# Altium PCB ESP32-PoE_Rev_G1.PcbDoc (part 2 of 3)
Units mm, origin at the board's own origin, x right, y up, seen from the top; angles counter-clockwise.
Board outline 28 x 75 mm, 2 copper layers (F.Cu, B.Cu); 132 components, 123 nets, 484 pads, 212 vias.
Unrouted connection lines stored in the file: 2.
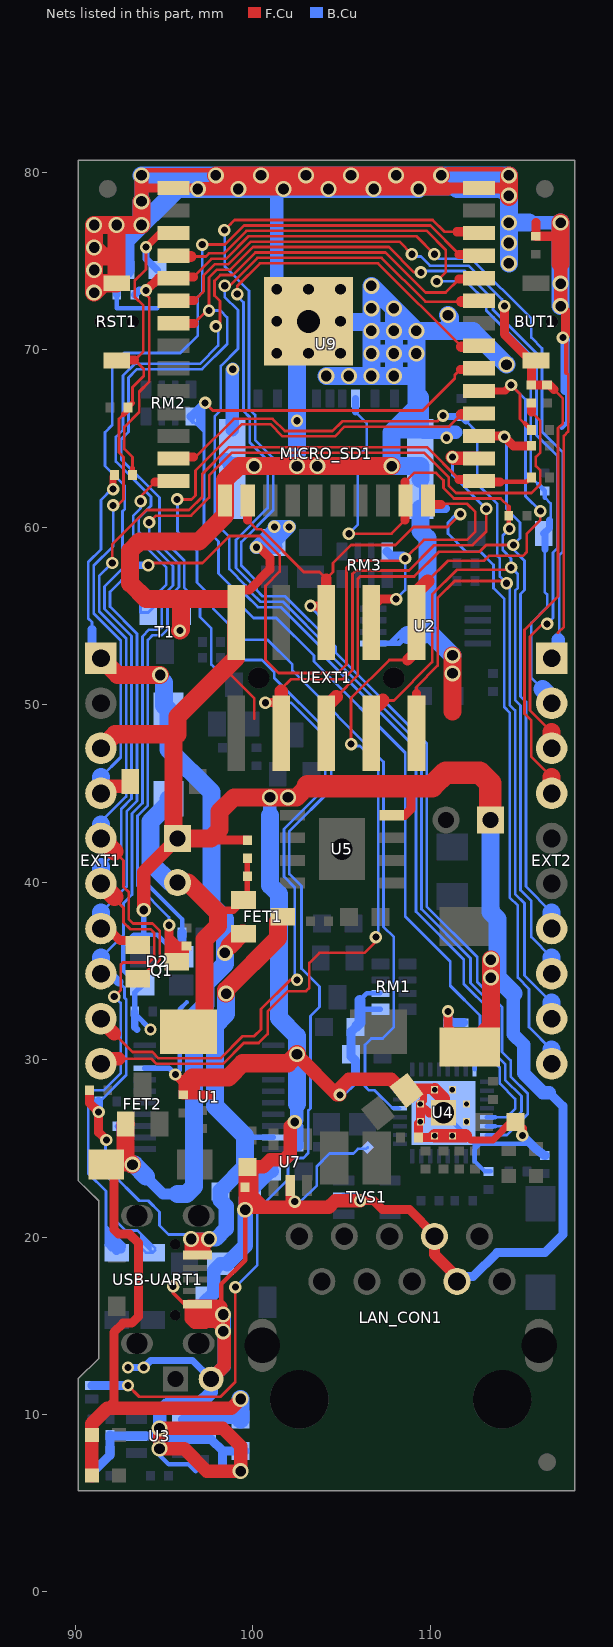
[diagram p2: the nets of this part, all layers, seen from the top]

## Via types
v1: diameter 0.7, hole 0.4, F.Cu to B.Cu, tented both sides, 119 vias
v2: diameter 0.9, hole 0.6, F.Cu to B.Cu, tented both sides, 89 vias
v3: diameter 0.8, hole 0.5, F.Cu to B.Cu, tented both sides, 4 vias

## Nets (pads, with @x,y where several pads share a name; then routed paths per layer and width w, separated by ;. In a path a pad name is that pad's centre, name@x,y a point inside that pad or via, vN(x,y) a via of type N, cw(c..) or ccw(c..) an arc to the next point about the centre after c; other vN are vias at no path point) (continued)
+5V: C1.1 CHRG1.2 D1.1 D3.2 EXT1.1 FET1.2 FET2.1 PWR1.2 R1.1 R4.1 U3.4 | length 88.8
  F.Cu w0.406: v1(92.126,62.156) 92.126,62.867 R4.1@92.202,62.943
  F.Cu w0.508: D3.2@91.757,24.145 92.17,23.732 92.17,20.43 92.433,20.167 93.049,20.167 93.548,19.668 93.548,15.521 93.175,15.148 92.685,15.148 92.164,14.626 92.164,10.721 91.783,10.34
  F.Cu w0.762: PWR1.2@90.932,6.555 90.932,7.254 CHRG1.2@90.932,8.841 90.932,9.489 91.783,10.34 98.781,10.34 98.864,10.423 v2(99.314,10.873) ; D3.2@91.734,24.081 v2(93.218,24.081) ; v2(98.425,36.019) 98.425,36.146 98.679,36.4
  F.Cu w1.016: EXT1.1@91.44,52.626 92.388,51.678 v2(94.775,51.678) ; FET2.1@92.84,26.367 92.837,26.364 92.837,24.437 v2@93.193,24.081 ; 98.679,36.4 99.377,37.099 FET1.2@99.477,37.099
  B.Cu w0.152: 90.932,54.244 90.932,54.663 90.726,54.868 90.726,58.038 91.44,58.752 91.44,61.546 92.05,62.156 v1(92.126,62.156)
  B.Cu w0.254: C1.1@99.068,9.976 C1.1@99.314,9.73 ; v2@99.203,10.476 99.314,10.365
  B.Cu w0.508: 90.932,54.244 90.932,53.134 EXT1.1@91.44,52.626 ; U3.4@96.042,9.728 97.788,9.728 R1.1@97.79,9.73 ; R1.1@97.663,9.603 R1.1@97.79,9.73 ; C1.1@99.314,9.73 R1.1@97.79,9.73
  B.Cu w0.635: 93.98,23.421 93.98,23.395 94.945,22.43 95.758,22.43
  B.Cu w0.762: v2(94.775,51.678) 94.775,51.48 94.996,51.259
  B.Cu w1.016: v2(93.218,24.081) 93.32,24.081 93.98,23.421 ; 94.996,51.259 94.996,49.949 D1.1@95.25,49.695 95.25,47.49 97.663,45.077 97.663,38.686 98.425,37.924 v2(98.425,36.019) 98.425,35.384 97.33,34.289 97.33,33.07 96.685,32.425 96.685,22.849 96.266,22.43 95.758,22.43 ; C1.1@99.314,9.73 99.314,10.365 v2(99.314,10.873)
+5V_USB: C7.1 FET1.3 R18.1 U1.19 USB-UART1.1 | length 38.2
  F.Cu w0.254: USB-UART1.1@96.626,18.904 USB-UART1.1@96.804,18.904
  F.Cu w0.508: 96.52,19.348 USB-UART1.1@96.876,18.992 97.536,19.651 v2(97.536,19.89)
  F.Cu w0.762: 96.52,19.348 v2(96.52,19.89) ; USB-UART1.1@97.282,19.128 v2(96.52,19.89) ; v2(97.536,19.89) v2(96.52,19.89) ; FET1.3@101.43,37.797 FET1.3@101.686,38.054
  F.Cu w1.016: v2(98.501,33.723) 98.501,33.936 101.43,36.865 FET1.3@101.43,37.797
  B.Cu w0.152: 92.456,25.732 92.456,24.97 92.075,24.589 92.075,23.573 93.599,22.049 94.107,22.049 94.742,21.414 94.742,20.652 95.25,20.144 96.266,20.144 v2(96.52,19.89)
  B.Cu w0.254: R18.1@92.329,26.24 92.456,26.113 92.456,25.732
  B.Cu w0.305: 99.568,25.691 99.643,25.616 U1.19@101.155,25.616
  B.Cu w0.762: v2(96.52,19.89) v2(97.536,19.89)
  B.Cu w0.864: v2(97.536,19.89) 97.917,19.89 98.501,20.474 98.501,21.744 98.171,22.074 C7.1@98.171,22.557 98.171,22.628 99.568,24.025
  B.Cu w1.016: v2(98.501,33.723) 98.501,32.565 97.866,31.93 97.866,27.393 99.568,25.691 99.568,24.025
+5VP: C23.1 C25.1 D1.2 FET1.1 L4.2 R38.1 | length 20.6
  F.Cu w0.305: FET1.1@99.477,39.001 99.695,39.219 R38.1@99.695,40.337 C23.1@99.695,41.353
  F.Cu w0.406: 98.044,38.284 98.183,38.423 98.898,38.423 FET1.1@99.477,39.001
  F.Cu w1.016: C25.1@95.758,39.976 96.352,39.976 98.044,38.284 98.044,37.543 97.282,36.781 97.282,32.479 L4.2@96.377,31.574
  B.Cu w1.016: D1.2@95.25,44.695 95.25,44.426 94.234,43.41 94.234,41.099 95.357,39.976 C25.1@95.758,39.976
D_Com: D2.3 R24.2 R49.2 | length 62.5
  F.Cu w0.152: v1(94.158,60.276) 94.539,60.657 96.52,60.657 97.536,61.673 97.536,62.918 98.83,64.211 109.653,64.211 111.049,62.816 111.049,62.341 111.457,61.932 115.702,61.932 116.205,62.435 116.205,63.197 115.951,63.451 115.951,63.959 116.205,64.213 116.205,65.991 115.697,66.499
  F.Cu w0.508: D2.3@95.279,35.667 95.279,36.879 ; v1(95.279,37.575) 95.279,36.879 ; D2.3@95.715,35.511 95.715,36.357 95.758,36.4 ; D2.3@95.758,35.511 96.135,35.511 96.139,35.515 96.139,36.273 R24.2@96.266,36.4 95.758,36.4 ; 115.697,66.499 R49.2@115.697,67.007 ; 95.279,36.879 95.279,36.429 95.308,36.4 95.758,36.4 ; 95.279,36.879 95.758,36.4
  B.Cu w0.152: v1(94.158,60.276) 94.158,59.598 95.834,57.921 95.834,56.632 95.186,55.985 95.186,54.244 94.869,53.926 94.361,53.926 94.082,53.647 94.082,44.325 93.497,43.741 93.497,39.804 95.279,38.022 v1(95.279,37.575)
ESP_EN: C20.1 D9.2 EXT1.4 R32.2 RST1.1 U9.3 | length 40.8
  F.Cu w0.152: v1(92.126,61.241) 92.38,61.241 92.71,61.571 92.71,63.959 92.456,64.213 92.456,66.118 92.71,66.372 ; 93.218,67.007 93.218,67.896 93.853,68.531 93.853,68.912 93.345,69.42 93.83,69.905 93.83,72.491 93.345,72.976 93.345,73.907 93.98,74.542 v1(93.98,75.791)
  F.Cu w0.305: 92.71,66.372 92.964,66.626 R32.2@92.964,66.753 93.218,67.007
  F.Cu w0.406: v1(93.98,75.791) 94.77,76.581 U9.3@95.64,76.581
  F.Cu w0.508: RST1.1@92.321,69.402 92.339,69.42 93.345,69.42
  F.Cu w0.762: EXT1.4@91.44,45.006 91.851,45.417 92.842,45.417 D9.2@93.096,45.671
  B.Cu w0.152: 91.44,45.925 92.558,47.043 92.558,53.621 91.034,55.145 91.034,57.838 92.126,58.93 v1(92.126,61.241)
  B.Cu w0.406: v1(93.98,75.791) 93.98,75.135 C20.1@94.615,74.5
  B.Cu w1.016: EXT1.4@91.44,45.006 91.44,45.925
GND: BAT1.2 C1.2 C2.1 C3.2 C4.2 C5.2 C6.2 C7.2 C8.2 C9.2 C11.2 C13.2 C14.2 C15.2 C16.2 C17.2 C18.2 C19.2 C20.2 C21.1 C22.2 C25.2 C27.2 D5.2 EXT1.3 L3.2 LAN_CON1.7 LAN_CON1.8 MICRO_SD1.6 MICRO_SD1.CH1 Q1.3 R1.2 R5.2 R6.2 R9.2 R15.2 R22.2 R26.2 R30.2 R34.2 R41.1 R47.2 RM1.1.1 RM1.2.1 RST1.2 T1.2 TVS1.2 U1.8 U2.5 U3.2 U4.24 U4.25 U4.33 U5.4 U7.2 U9.1 U9.15 U9.38 U9.39 UEXT1.2 USB-UART1.5 | length 621.9
  F.Cu w0.152: 98.369,51.95 98.496,51.95 100.076,50.37 100.076,49.227 ; 117.203,54.063 117.528,54.388 117.528,65.153 117.775,65.399 117.775,68.612 117.665,68.722
  F.Cu w0.203: v1@95.507,17.525 95.507,16.862 96.152,16.217 USB-UART1.5@96.876,16.217
  F.Cu w0.254: v2(93.726,79.834) 94.025,80.133 97.618,80.133 v2(97.917,79.834) ; 98.209,16.217 98.209,17.337 99.568,18.696 v2(99.568,21.541) ; 104.521,21.922 104.648,22.049 ; v2(110.617,79.834) 110.954,80.171 114.09,80.171 v2(114.427,79.834) ; v1(117.475,70.69) 117.665,70.5 117.665,68.722
  F.Cu w0.406: 99.949,22.43 100.076,22.43 100.838,21.668 ; C22.2@109.626,28.04 109.626,27.684 U4.33@109.444,27.502 109.944,27.002 ; 111.984,25.702 112.044,25.702 112.268,25.478 113.538,25.478 114.554,26.494 C21.1@114.808,26.494 ; C21.1@115.062,26.494 C21.1@114.808,26.494 ; C21.1@115.189,26.113 C21.1@114.808,26.494
  F.Cu w0.508: v2(93.726,79.834) 93.726,79.326 93.931,79.121 U9.1@95.54,79.121 96.852,79.121 v2(96.901,79.072) ; v1(95.631,29.161) 96.012,28.78 96.393,28.78 96.08,28.78 96.075,28.776 C8.2@96.075,28.018 ; 96.774,28.399 96.393,28.018 C8.2@96.075,28.018 ; USB-UART1.5@97.346,16.207 97.346,15.064 ; 97.643,42.476 97.75,42.369 R34.2@99.695,42.369 ; 97.663,28.018 C8.2@96.075,28.018 ; v2(98.331,14.683) 97.881,15.133 97.414,15.133 97.346,15.064 ; v2(98.331,15.636) 98.331,16.095 98.209,16.217 USB-UART1.5@96.876,16.217 96.402,16.217 96.393,16.207 96.393,15.382 96.71,15.064 97.346,15.064 ; UEXT1.2@98.933,55.958 99.06,55.831 UEXT1.2@99.06,54.638 99.06,56.339 99.187,56.466 99.794,56.466 100.965,57.637 100.965,58.273 100.359,58.879 v1(100.203,58.879) ; R30.2@99.568,22.684 R30.2@99.568,22.811 99.568,23.827 C6.2@99.695,23.954 ; C6.2@99.568,23.954 C6.2@99.695,23.954 ; 99.695,23.192 C6.2@99.695,23.954 ; v2(100.076,63.451) 100.571,63.451 ; U7.2@102.108,22.908 102.108,21.922 102.362,21.668 v1(102.362,21.998) ; v1(106.045,22.049) 106.807,22.049 107.315,21.541 108.839,21.541 110.236,20.144 LAN_CON1.7@110.236,20.04 LAN_CON1.7@110.236,19.763 ; U5.4@107.829,43.766 108.554,43.766 108.917,44.129 108.917,45.339 108.839,45.417 ; C22.2@108.662,28.253 C22.2@108.767,28.358 ; U4.33@109.444,27.502 U4.33@109.444,26.502 109.347,26.405 C11.2@109.347,25.605 110.147,25.605 U4.33@110.244,25.702 ; 109.944,27.002 U4.33@110.744,27.002 ; U4.33@110.188,28.358 U4.33@110.244,28.302 U4.33@110.206,28.302 ; v1(110.998,32.717) 110.998,31.828 112.112,30.714 D5.2@112.217,30.714 ; v1(115.189,25.732) C21.1@115.189,26.113 ; R47.2@115.951,76.405 115.951,77.167 ; R47.2@116.078,76.405 116.967,76.405 117.348,76.024 v2(117.348,72.468) 117.615,72.201 117.615,70.83 v1(117.475,70.69)
  F.Cu w0.61: C22.2@108.767,28.358 U4.33@110.188,28.358 ; LAN_CON1.7@110.236,20.04 110.236,19.017 111.506,17.747 LAN_CON1.8@111.506,17.5 ; 110.944,79.072 110.993,79.121 U9.38@112.74,79.121 113.997,79.121 v2(114.427,78.691)
  F.Cu w0.762: v2(93.726,78.374) v2(93.726,79.834) ; v3(93.853,38.432) 93.853,40.571 C25.2@95.758,42.476 ; 96.774,15.636 v2(98.331,15.636) v2(98.331,14.683) 98.4,14.614 98.4,12.753 BAT1.2@97.663,12.016 ; v2(96.901,79.072) 110.944,79.072 ; C6.2@99.568,23.954 R30.2@99.568,22.811 v2(99.568,21.541) ; v3(102.362,26.494) 102.108,26.24 102.108,24.716 101.753,24.361 100.991,24.361 100.584,23.954 C6.2@99.695,23.954 99.949,23.7 99.949,22.43 99.949,21.922 v2(99.568,21.541) ; v2(102.489,30.304) 102.489,30.257 104.728,28.018 v1(104.902,28.018) 104.902,28.374 105.41,28.882 107.798,28.882 108.426,28.253 C22.2@108.662,28.253 ; v1(106.045,22.049) 104.648,22.049 104.267,21.668 103.251,21.668 102.362,21.668 101.092,21.668 100.838,21.668 99.695,21.668 v2(99.568,21.541) ; U4.33@110.244,25.702 110.714,25.702 U4.33@111.244,25.702 111.984,25.702 ; U4.33@110.244,28.302 110.744,27.802 U4.33@110.744,27.002 ; v2(117.348,72.468) v2(117.348,73.738) 117.348,74.881 ; v2(94.742,8.079) v2(94.742,9.222) 98.298,9.222 99.314,8.206 v2(99.314,6.809) 97.409,6.809 96.139,8.079 v2(94.742,8.079)
  F.Cu w1.016: v2(91.059,75.77) 91.567,75.262 92.329,75.262 ; EXT1.3@91.44,47.546 92.232,48.338 95.758,48.338 ; RST1.2@92.321,73.756 91.585,73.756 v2(91.059,73.23) v2(91.059,77.04) v2(93.726,77.04) v2(93.726,78.374) ; RST1.2@92.329,73.992 92.329,75.262 ; v2(92.329,77.04) 92.329,75.262 ; v1(95.885,54.18) 95.955,54.25 95.955,55.774 96.139,55.958 ; 96.393,28.78 96.52,28.907 96.606,28.993 98.618,28.993 99.421,29.796 101.981,29.796 v2(102.489,30.304) ; v2(97.917,79.834) v2(110.617,79.834) ; UEXT1.2@98.933,55.958 96.139,55.958 ; UEXT1.2@99.06,54.638 99.06,52.641 98.369,51.95 95.758,49.339 95.758,48.338 ; 103.095,45.417 102.46,44.782 v2(101.981,44.782) v2(100.965,44.782) 98.928,44.782 98.126,43.98 98.126,42.959 97.643,42.476 C25.2@95.758,42.476 95.518,42.716 95.518,48.098 95.758,48.338 ; v2(107.823,63.451) v2(103.632,63.451) v2(102.489,63.451) v2(100.076,63.451) 99.211,63.451 98.44,62.68 U9.15@98.44,61.511 98.44,60.672 96.977,59.209 93.623,59.209 93.091,58.678 93.091,56.847 93.98,55.958 96.139,55.958 ; 111.252,49.608 v2(111.252,52.783) ; D5.2@111.916,30.812 112.141,30.587 113.411,31.857 v2(113.411,34.622) v2(113.411,35.638) ; v2@114.427,78.628 114.427,79.198 v2(114.427,79.834) ; 117.348,74.881 v2(117.348,77.167)
  F.Cu w1.27: 103.095,45.417 108.839,45.417 110.109,45.417 110.871,46.179 112.776,46.179 113.391,45.564 C27.2@113.391,43.512
  B.Cu w0.152: MICRO_SD1.CH1@98.84,61.059 MICRO_SD1.CH1@98.84,63.459 ; v1(102.362,21.998) 102.692,21.998 103.607,22.913 103.607,23.992 104.331,24.716 105.664,24.716 105.918,24.97 106.386,24.97 R26.2@106.47,25.053 ; MICRO_SD1.CH1@109.44,61.059 MICRO_SD1.CH1@109.44,63.459
  B.Cu w0.203: C13.2@101.092,23.7 101.092,23.73 102.296,24.934 102.453,24.934 C16.2@102.616,25.097
  B.Cu w0.254: R9.2@92.329,73.103 92.329,72.341 94.615,72.341 ; Q1.3@93.769,34.203 93.51,34.203 92.71,35.003 92.71,36.451 93.294,37.035 93.853,37.035 94.615,37.035 95.847,35.803 Q1.3@95.969,35.803 Q1.3@96.096,35.93 ; 93.98,39.956 96.012,37.924 C4.2@96.012,37.162 ; v2(94.742,8.079) 94.742,7.698 95.25,7.19 96.393,7.19 96.774,6.809 ; v1(95.631,29.161) 95.885,29.415 95.885,32.844 96.266,33.225 ; 106.045,33.352 106.426,33.733 RM1.2.1@107.188,33.733 ; U4.33@110.744,27.002 U4.33@112.494,25.252 ; C15.2@113.411,23.7 113.081,23.7 112.494,24.287 U4.25@112.494,24.552 ; 115.951,24.97 115.669,25.252 114.335,25.252 U4.24@113.194,25.252 ; 117.411,65.61 117.729,65.928 117.729,67.579 117.602,67.706 ; U4.25@112.494,24.552 U4.33@112.494,25.252 ; U4.25@112.494,24.552 112.494,24.942 112.804,25.252 U4.24@113.194,25.252 ; U4.33@112.494,25.252 U4.24@113.194,25.252
  B.Cu w0.305: Q1.3@93.769,34.203 93.345,33.779 C5.2@93.345,32.717 93.345,32.59 v1(94.234,31.701) ; 93.853,37.035 v3(93.853,38.432) ; U1.8@93.916,29.516 95.276,29.516 v1(95.631,29.161) ; Q1.3@95.758,36.083 Q1.3@96.075,35.765 ; 106.045,32.844 RM1.1.1@107.188,32.844 ; U2.5@106.778,53.459 107.737,53.459 ; 108.331,54.053 107.737,53.459 ; 108.712,53.926 108.245,53.459 107.737,53.459
  B.Cu w0.406: R9.2@92.329,73.103 92.329,73.992 C20.2@92.837,74.5 ; v1(92.964,12.651) v1(93.853,12.651) 94.251,13.049 96.597,13.049 BAT1.2@97.65,11.996 ; C5.2@93.345,32.717 93.345,31.828 93.472,31.701
  B.Cu w0.508: R5.2@90.932,6.555 90.932,6.682 91.948,7.698 C19.2@91.948,7.952 R22.2@91.948,8.841 92.011,8.778 U3.2@93.442,8.778 94.297,8.778 v2(94.742,9.222) 95.377,8.587 R1.2@97.663,8.587 98.298,7.952 ; Q1.3@96.012,35.765 C4.2@96.012,37.162 ; BAT1.2@97.643,11.996 BAT1.2@97.65,11.996 BAT1.2@97.757,11.889 ; v2(98.331,15.636) v2@98.35,15.616 ; MICRO_SD1.CH1@98.84,62.951 99.34,63.451 99.581,63.451 v2(100.076,63.451) ; C1.2@99.06,8.206 C1.2@99.314,7.952 ; C1.2@99.568,7.952 C1.2@99.314,7.952 ; v1(100.203,58.879) 100.965,58.879 C3.2@101.219,59.133 ; v3(102.362,26.494) 102.616,26.24 C16.2@102.616,25.097 ; v1(104.902,28.018) C18.2@105.791,28.907 105.791,29.923 105.537,30.177 C17.2@105.537,30.304 105.537,31.574 C9.2@105.791,31.828 ; TVS1.2@105.126,22.237 105.857,22.237 v1(106.045,22.049) ; MICRO_SD1.CH1@109.44,61.059 110.85,61.059 ; C14.2@110.998,32.082 111.379,32.082 ; v1(110.998,32.717) 110.998,32.336 111.252,32.082 111.379,32.082 ; LAN_CON1.8@111.506,17.5 111.788,17.782 112.42,17.782 113.767,19.128 116.459,19.128 117.475,20.144 117.475,27.383 116.713,28.145 ; R41.1@111.887,32.082 111.379,32.082 ; v1(115.189,25.732) 115.951,24.97 R15.2@116.459,24.589 ; v2(117.348,72.468) 117.615,72.201 117.615,70.83 v1(117.475,70.69) 117.617,70.548 117.602,70.534 117.602,67.706 ; 98.298,7.952 R6.2@98.298,7.444 98.298,6.809 v2(99.314,6.809) C1.2@99.314,7.952 ; 98.298,7.952 C1.2@99.314,7.952
  B.Cu w0.61: C9.2@105.855,31.892 106.045,32.082 106.045,32.844 106.045,33.352
  B.Cu w0.762: v2(93.726,78.374) v2(93.726,79.834) ; v2(94.742,9.222) 94.742,10.111 95.25,10.619 97.028,10.619 97.65,11.241 BAT1.2@97.65,11.996 98.387,12.732 98.387,15.579 v2@98.35,15.616 ; T1.2@95.885,55.196 95.885,54.688 v1(95.885,54.18) 96.012,54.307 T1.2@96.012,55.196 ; v2(98.331,15.636) 97.726,15.636 97.282,16.08 C2.1@97.282,16.334 97.79,16.842 97.79,18.112 L3.2@98.171,18.493 L3.2@98.552,18.493 ; MICRO_SD1.CH1@98.489,63.81 MICRO_SD1.CH1@98.84,63.459 ; MICRO_SD1.CH1@98.84,65.509 98.84,68.883 v1(98.87,68.912) ; v2(99.568,21.541) 99.568,22.176 C7.2@99.949,22.557 99.949,22.684 100.965,23.7 C13.2@101.092,23.7 ; 100.076,79.072 101.346,79.072 101.346,73.484 U9.39@103.251,71.579 ; 100.965,43.766 v2(100.965,44.782) ; C3.2@101.219,59.133 101.219,59.197 v1(102.044,60.022) v1(101.219,60.022) 101.219,59.895 v1(100.203,58.879) 100.698,58.879 C3.2@101.282,58.879 ; v3(102.362,26.494) 102.489,26.621 102.489,27.51 ; v2@108.966,79.072 111.506,79.072 113.665,79.072 v2(114.427,79.834) ; MICRO_SD1.CH1@109.44,65.509 109.593,65.356 111.442,65.356 ; 114.681,33.733 114.681,31.422 115.265,30.837 115.265,29.224 116.345,28.145 116.713,28.145 ; 115.57,77.167 v2(117.348,77.167)
  B.Cu w0.864: L3.2@98.552,18.493 99.568,19.509 v2(99.568,21.541)
  B.Cu w1.016: C20.2@92.837,74.5 92.837,76.151 95.758,79.072 v2(96.901,79.072) ; v2(93.726,77.04) v2(93.726,78.374) ; v2(93.726,79.834) v2(114.427,79.834) v2(114.427,74.881) ; MICRO_SD1.CH1@98.84,63.459 100.068,63.459 v2(100.076,63.451) ; 100.076,79.072 v2(96.901,79.072) ; 100.965,43.766 100.965,39.829 101.473,39.321 101.473,32.336 102.489,31.32 v2(102.489,30.304) 102.489,27.51 ; v2(102.489,63.451) MICRO_SD1.6@102.49,67.259 MICRO_SD1.6@102.49,67.259 102.49,70.945 U9.39@103.124,71.579 ; 103.124,79.072 106.045,79.072 ; U9.39@103.251,71.579 106.172,71.579 ; v2(104.14,68.531) 109.22,68.531 ; v2(106.68,68.531) v2(106.68,73.611) v2(109.22,71.071) ; v2(106.68,69.801) v2(109.22,69.801) ; v2(106.68,71.071) v2(109.22,71.071) ; v2(107.95,68.531) v2(107.95,72.341) ; 108.712,53.926 109.601,53.926 109.855,54.18 ; MICRO_SD1.CH1@109.22,63.451 v2(107.823,63.451) ; v2(109.347,79.072) v2(96.901,79.072) ; MICRO_SD1.CH1@109.41,65.547 109.41,66.436 ; MICRO_SD1.CH1@109.44,61.059 109.44,59.802 109.855,59.387 109.855,54.18 ; MICRO_SD1.CH1@109.44,62.723 MICRO_SD1.CH1@109.44,63.459 107.831,63.459 v2(107.823,63.451) ; MICRO_SD1.CH1@109.44,65.509 107.976,65.509 107.823,65.356 ; v2(110.998,71.96) 111.125,71.833 111.125,71.071 ; v2(111.252,52.783) 109.855,54.18 ; 111.506,79.072 114.046,79.072 v2(114.427,78.691) ; C27.2@113.391,43.512 113.391,42.008 113.391,38.325 113.792,37.924 113.792,34.622 114.681,33.733 ; v2(114.3,69.166) 112.395,71.071 111.125,71.071 ; v2(114.427,77.167) 115.57,77.167 ; v2(117.348,72.468) v2(117.348,77.167) ; v2(107.823,63.451) 107.823,65.356 ; 107.823,65.356 109.41,66.944 ; 109.22,68.531 v2(109.22,71.071) ; 109.22,68.531 109.22,67.515 109.41,67.325 109.41,66.944 ; 109.22,68.531 109.22,66.626 109.41,66.436 ; v2(109.22,71.071) 111.125,71.071 ; 109.41,66.436 109.41,66.944
  other v1: 95.504,17.223 110.922,65.051 102.489,66.009
  other v2: 111.252,51.767 105.41,68.531 107.95,69.801 107.95,71.071 106.68,72.341 91.059,74.5 114.427,76.024 99.187,79.072 101.727,79.072 104.267,79.072 106.807,79.072 100.457,79.834 102.997,79.834 105.537,79.834 108.077,79.834
GPI34\BUT1: BUT1.1 EXT2.4 R48.2 R49.1 U9.6 | length 53.7
  F.Cu w0.152: 96.696,72.771 97.224,73.299 97.224,74.192 97.862,74.83 98.618,74.83 99.888,76.1 108.255,76.1 v1(108.966,75.389) ; 116.84,45.925 115.697,47.068 115.697,49.118 115.316,49.499 115.316,54.221 117.202,56.108 117.202,65.591 117.47,65.859 117.47,67.266 116.967,67.769
  F.Cu w0.508: U9.6@95.54,72.771 96.696,72.771 ; v1(114.173,72.468) 114.173,71.973 114.173,70.888 115.659,69.402 BUT1.1@115.959,69.402 BUT1.1@116.096,69.402 ; BUT1.1@115.951,69.42 115.697,69.166 R49.1@115.697,68.023 116.078,68.023 R48.2@116.586,68.023 116.713,68.023 116.967,67.769
  F.Cu w1.016: EXT2.4@116.84,45.006 116.84,45.925
  B.Cu w0.152: v1(108.966,75.389) 109.093,75.262 109.474,75.262 109.988,74.748 112.147,74.748 114.046,72.849 114.046,72.595 v1(114.173,72.468)
GPI35: BAT_SENS_E1.1 EXT2.3 U9.7 | length 135.8
  F.Cu w0.152: v1(92.964,11.635) 93.599,11 98.171,11 99.017,11.846 v1(99.017,17.18) ; 96.696,71.501 97.413,72.218 v1(97.532,72.218) 97.532,74.069 97.989,74.525 98.745,74.525 100.015,75.795 107.671,75.795 109.093,74.373 v1(109.474,74.373) ; v1(116.586,54.561) 116.332,54.561 115.621,53.85 115.621,49.684 116.84,48.465
  F.Cu w0.508: U9.7@95.54,71.501 96.696,71.501
  F.Cu w1.016: EXT2.3@116.84,47.546 116.84,48.465
  B.Cu w0.152: v1(97.532,72.218) 98.167,72.218 98.552,71.833 98.552,70.319 97.145,68.912 93.472,68.912 92.989,68.429 92.989,65.371 92.583,64.965 92.583,63.832 94.742,61.673 94.742,59.514 96.139,58.117 96.139,56.593 97.028,55.704 97.028,54.942 97.663,54.307 97.663,52.275 97.815,52.123 98.654,52.123 99.06,52.529 100.515,52.529 101.208,51.837 101.208,51.502 104.14,48.569 104.14,47.236 104.419,46.956 104.419,45.239 102.057,42.877 102.057,40.464 102.743,39.778 102.743,35.13 103.759,34.114 103.759,32.971 103.251,32.463 103.251,27.256 103.124,27.129 103.124,24.741 102.845,24.462 102.291,24.462 101.981,24.152 101.981,23.243 100.254,21.516 100.254,18.417 v1(99.017,17.18) ; v1(109.474,74.373) 109.545,74.444 111.943,74.444 113.538,72.849 113.538,72.264 115.992,69.81 115.992,65.188 117.165,64.015 117.165,58.823 116.916,58.574 116.916,54.891 v1(116.586,54.561)
  B.Cu w0.508: BAT_SENS_E1.1@90.932,11.635 v1(92.964,11.635)
GPI36\U1RXD: D4.2 EXT2.2 R37.2 U9.4 | length 46.9
  F.Cu w0.152: 96.52,75.262 97.355,75.262 97.533,75.44 98.366,75.44 99.636,76.71 109.804,76.71 110.871,75.643 110.871,74.373 v1(110.363,73.865)
  F.Cu w0.61: U9.4@95.54,75.311 95.589,75.262 96.52,75.262
  B.Cu w0.152: v1(110.363,73.865) 112.014,73.865 113.157,72.722 113.157,72.214 115.672,69.699 115.672,62.841 116.078,62.435 ; 116.332,50.878 115.697,51.513 115.697,54.615 116.586,55.504 116.586,56.212 116.459,56.339 116.459,58.752 ; 116.459,61.673 116.784,61.348 116.784,60.474 116.713,60.403
  B.Cu w0.254: 116.078,62.435 R37.2@116.459,62.054 116.459,61.673
  B.Cu w0.406: 116.459,58.752 116.459,59.592 D4.2@116.4,59.651 116.713,59.964 116.713,60.403
  B.Cu w1.016: 116.332,50.878 116.84,50.37 EXT2.2@116.84,50.086
GPI39: EXT2.1 R4.2 R9.1 U9.5 | length 57
  F.Cu w0.152: 93.218,63.324 93.218,63.959 92.761,64.416 92.761,65.661 93.599,66.499 93.599,67.642 94.17,68.213 94.17,72.913 93.98,73.103 v1(93.98,73.357) ; 96.647,74.119 97.663,75.135 98.492,75.135 99.762,76.405 109.22,76.405 v1(110.236,75.389)
  F.Cu w0.305: R4.2@93.218,62.943 93.218,63.324
  F.Cu w0.508: v1(93.98,73.357) 94.003,73.357 94.687,74.041 U9.5@95.54,74.041 95.618,74.119 96.647,74.119
  B.Cu w0.152: v1(110.236,75.389) 110.49,75.135 112.331,75.135 115.697,71.77 115.697,70.69 116.302,70.085 116.302,65.386 117.47,64.218 117.47,58.63 117.272,58.432 117.272,53.723 117.221,53.672
  B.Cu w0.406: R9.1@93.345,73.103 93.599,73.357 v1(93.98,73.357)
  B.Cu w0.762: EXT2.1@116.84,52.626 117.221,53.007 117.221,53.672
GPIO0: D2.2 EXT1.5 R44.1 U9.25 | length 56.2
  F.Cu w0.152: v1(92.075,57.99) 92.075,59.031 94.018,60.975 96.406,60.975 97.155,61.723 97.155,63.019 98.652,64.516 109.806,64.516 111.633,62.689 ; 92.202,41.734 92.71,41.226 92.71,39.737 93.013,39.434 93.013,37.908 93.252,37.67 94.349,37.67 94.748,37.27 94.748,35.594 94.259,35.105
  F.Cu w0.254: 113.919,62.562 115.443,62.562 R44.1@115.697,62.816
  F.Cu w0.305: D2.2@93.515,34.561 93.715,34.561 94.259,35.105
  F.Cu w0.508: 111.633,62.689 112.662,62.689 U9.25@112.74,62.611 112.789,62.562 113.919,62.562
  F.Cu w1.016: EXT1.5@91.44,42.466 91.47,42.466 92.202,41.734
  B.Cu w0.152: EXT1.5@91.44,43.258 91.44,43.41 92.862,44.833 92.862,53.748 91.338,55.272 91.338,57.253 91.725,57.64 v1(92.075,57.99)
  B.Cu w1.016: EXT1.5@91.44,42.466 EXT1.5@91.44,43.258
GPIO1\U0TXD: D7.1 EXT1.6 U9.35 | length 90.3
  F.Cu w0.152: v1(92.189,33.548) 92.539,33.898 92.558,33.917 92.558,35.359 92.677,35.478 94.144,35.478 94.444,35.778 94.444,37.144 94.235,37.353 93.091,37.353 92.709,37.735 92.709,38.56 92.202,39.067 92.202,39.164 ; v1(97.148,75.936) 97.643,75.936 98.431,75.936 99.51,77.015 110.007,77.015 111.633,75.389
  F.Cu w0.508: 111.633,75.389 112.662,75.389 U9.35@112.74,75.311
  F.Cu w1.016: EXT1.6@91.44,39.926 92.202,39.164
  B.Cu w0.152: 91.44,40.845 92.583,41.988 92.583,44.122 93.167,44.706 93.167,53.876 91.643,55.4 91.643,56.669 92.654,57.68 92.654,60.905 92.786,61.038 92.786,62.336 91.669,63.453 91.669,65.351 92.07,65.752 92.07,69.161 92.735,69.826 95.91,69.826 96.901,70.817 96.901,72.976 97.148,73.223 v1(97.148,75.936) ; 92.138,20.017 91.719,20.436 91.719,20.754 ; v1(92.189,33.548) 92.539,33.198 92.562,33.175 92.562,29.253 91.58,28.272 90.932,28.272 90.726,28.066 90.726,23.588 91.719,22.595 91.719,20.754 ; D7.1@92.329,19.25 92.017,19.25 91.719,19.547 91.719,20.754 ; D7.1@92.773,19.446 92.773,19.573 91.719,20.627 91.719,20.754
  B.Cu w0.508: D7.1@92.329,19.25 91.885,19.694 91.885,20.017 D7.1@92.583,19.319
  B.Cu w1.016: EXT1.6@91.44,39.926 91.44,40.845
GPIO2\HS2_DATA0: D2.1 EXT1.7 R46.1 RM3.4.1 U9.24 UEXT1.8 | length 69.2
  F.Cu w0.152: v1(94.107,57.863) 94.234,57.99 97.155,57.99 98.679,59.514 100.407,59.514 101.511,58.409 101.511,57.5 100.711,56.7 100.711,52.529 101.448,51.792 104.8,51.792 105.283,52.275 105.283,57.736 105.664,58.117 108.458,58.117 v1(108.585,58.244) 109.639,59.298 112.064,59.298 112.539,59.773 112.539,60.867 112.083,61.323 110.648,61.323 110.617,61.292
  F.Cu w0.508: EXT1.7@91.44,37.386 91.851,37.386 92.536,36.701 93.275,36.701 D2.1@93.515,36.461 ; UEXT1.8@106.68,54.638 106.68,55.45 107.188,55.958 v1(108.077,55.958) ; U9.24@109.87,61.511 110.089,61.292 110.617,61.292
  B.Cu w0.152: 91.44,38.305 92.888,39.753 92.888,43.995 93.472,44.579 93.472,54.002 91.948,55.526 91.948,56.364 93.193,57.609 R46.1@93.218,57.609 ; v1(108.077,55.958) 108.585,56.466 v1(108.585,58.244)
  B.Cu w0.406: R46.1@93.218,57.609 93.472,57.863 v1(94.107,57.863)
  B.Cu w0.508: RM3.4.1@107.569,58.625 107.823,58.371 108.458,58.371 v1(108.585,58.244)
  B.Cu w1.016: EXT1.7@91.44,37.386 91.44,38.305
GPIO3\U0RXD: D6.2 EXT1.8 R16.1 R19.2 U9.34 | length 88.9
  F.Cu w0.152: v1(97.917,71.325) 98.147,71.555 98.147,72.746 97.837,73.056 97.837,73.891 98.166,74.221 98.871,74.221 100.141,75.491 107.467,75.491 109.728,73.23 110.871,73.23 111.633,73.992
  F.Cu w0.508: R16.1@90.805,28.272 90.805,27.764 90.805,27.554 v1(91.31,27.049) 91.31,25.905 v1(91.742,25.473) ; 111.633,73.992 112.691,73.992 U9.34@112.74,74.041
  B.Cu w0.152: R19.2@91.313,27.637 91.44,27.637 91.44,27.701 92.866,29.127 92.866,33.394 92.771,33.49 92.771,34.053 92.456,34.368 ; 91.44,35.765 92.71,37.035 92.71,38.813 93.193,39.296 93.193,43.868 93.777,44.452 93.777,53.85 94.158,54.231 94.729,54.231 94.869,54.371 94.869,56.098 95.504,56.733 95.504,57.812 93.574,59.743 93.574,60.53 94.259,61.216 94.259,61.725 92.278,63.706 92.278,65.092 92.685,65.498 92.685,68.556 93.346,69.217 97.019,69.217 98.044,70.242 98.044,71.198 v1(97.917,71.325) ; v1(91.742,25.473) 91.694,25.425 91.694,23.497 92.329,22.862 92.329,20.879 92.833,20.375 93.495,20.375 93.726,20.144 ; D6.2@94.234,19.382 93.98,19.636 93.726,19.89 ; D6.2@94.234,19.509 93.98,19.763 93.726,20.017 ; D6.2@94.488,19.255 D6.2@94.361,19.128 ; D6.2@94.488,19.382 94.234,19.636 93.726,20.144 ; 93.726,19.763 93.726,19.382 93.985,19.123 D6.2@94.361,19.123 D6.2@94.361,19.128 ; 93.726,19.763 93.726,19.89 ; 93.726,19.763 93.98,19.509 D6.2@94.361,19.128 ; 93.726,19.89 93.726,20.017 ; 93.726,20.017 93.726,20.144
  B.Cu w0.508: v1(91.31,27.049) 91.313,27.052 R19.2@91.313,27.637 ; EXT1.8@91.44,34.846 91.978,34.846 92.456,34.368
  B.Cu w1.016: EXT1.8@91.44,34.846 91.44,35.765
GPIO4\U1TXD: EXT1.9 U9.26 UEXT1.3 | length 63.5
  F.Cu w0.152: 92.202,31.447 93.218,30.431 94.334,30.431 94.694,30.071 98.171,30.071 99.42,31.32 100.076,31.32 100.457,31.701 100.457,32.844 102.108,34.495 v1(102.489,34.495) ; 101.6,50.751 101.6,50.878 102.159,51.437 105.08,51.437 105.613,51.97 105.613,57.381 105.803,57.571 108.801,57.571 110.223,58.993 112.382,58.993 113.157,59.768 v1(113.157,61.038)
  F.Cu w0.508: v1(100.711,50.116) 101.219,50.116 101.6,49.735 UEXT1.3@101.6,48.388
  F.Cu w0.762: EXT1.9@91.44,32.306 91.44,32.209 92.202,31.447 ; UEXT1.3@101.6,48.388 101.6,50.751 ; v1(111.252,63.959) 111.33,63.881 U9.26@112.74,63.881
  F.Cu w1.016: EXT1.9@91.44,32.306 EXT1.9@91.474,32.273
  B.Cu w0.152: v1(100.711,50.116) 102.161,50.116 103.759,48.518 103.759,47.167 104.089,46.837 104.089,45.341 101.752,43.004 101.752,40.312 102.362,39.702 102.362,34.622 v1(102.489,34.495) ; v1(111.252,63.959) 111.252,62.943 v1(113.157,61.038)
GPIO5\SPI_CS: EXT1.10 R36.2 U9.29 UEXT1.10 | length 65.4
  F.Cu w0.152: 92.456,30.05 94.284,30.05 94.568,29.766 98.316,29.766 99.489,30.939 100.33,30.939 100.838,31.447 100.838,32.717 101.981,33.86 102.997,33.86 103.188,34.051 103.188,35.448 103.759,36.019 106.299,36.019 106.934,36.654 v1(106.934,36.908) ; v1(105.537,47.779) 105.537,50.37 107.696,52.529 108.712,52.529 ; 109.855,56.974 110.998,58.117 113.03,58.117 113.309,58.396 115.214,58.396 115.443,58.625 115.443,59.641 116.205,60.403 v1(116.205,60.911) ; v1(114.554,68.023) 115.062,67.515 115.062,66.118 115.316,65.864
  F.Cu w0.254: 115.316,65.864 R36.2@115.697,65.483
  F.Cu w0.406: U9.29@112.74,67.691 114.222,67.691 v1(114.554,68.023)
  F.Cu w0.61: 108.712,52.529 109.22,53.037 UEXT1.10@109.22,54.638
  F.Cu w0.762: EXT1.10@91.44,29.766 91.724,30.05 92.456,30.05 ; UEXT1.10@109.22,54.638 109.22,56.339 109.855,56.974
  B.Cu w0.152: v1(105.537,47.779) 105.639,47.678 106.045,47.678 107.061,46.662 107.061,37.035 v1(106.934,36.908) ; v1(114.554,68.023) 115.364,67.213 115.364,61.752 v1(116.205,60.911)
GPIO12\PHY_PWR: T1.1 U9.14 | length 14.4
  F.Cu w0.152: v1(93.675,61.47) 93.675,61.749 94.488,62.562
  F.Cu w0.508: 94.488,62.562 95.491,62.562 U9.14@95.54,62.611
  B.Cu w0.152: v1(93.675,61.47) 93.675,61.063 93.269,60.657 93.269,59.59 95.123,57.736 95.123,56.783 94.488,56.148 ; 93.675,55.907 93.751,55.983 ; 93.675,55.907 94.437,55.907 94.488,55.958 ; 93.675,55.907 93.675,55.196 T1.1@94.107,55.196 94.488,55.577 94.488,55.958 ; 93.751,55.983 93.84,56.072 ; 93.751,55.983 94.463,55.983 94.488,55.958 ; 93.84,56.072 93.916,56.148 94.488,56.148 ; 93.84,56.072 93.853,56.06 94.488,56.06 ; 94.488,55.958 94.488,56.06 ; 94.488,56.06 94.488,56.148
GPIO13\I2C-SDA: EXT2.10 R35.2 U9.16 UEXT1.6 | length 56
  F.Cu w0.152: 99.695,60.403 100.203,59.895 100.457,59.895 102.87,57.482 103.759,57.482 104.14,57.101 104.521,57.482 104.521,57.99 105.537,59.006 108.034,59.006 109.05,60.022 110.974,60.022 v1(111.697,60.744)
  F.Cu w0.406: UEXT1.6@104.14,54.638 UEXT1.6@104.14,55.069
  F.Cu w0.508: 99.695,60.403 99.695,61.496 U9.16@99.71,61.511 ; v1(103.251,55.577) 103.632,55.577 UEXT1.6@104.14,55.069
  F.Cu w0.61: UEXT1.6@104.14,54.638 104.14,57.101
  B.Cu w0.152: v1(111.697,60.744) 111.466,60.744 110.998,60.276 110.998,59.641 112.014,58.625 112.823,58.625 113.562,57.887 113.562,56.569 114.173,55.958 114.173,49.862 114.478,49.557 114.478,39.143 114.935,38.686 114.935,34.622 115.57,33.987 115.57,31.828 EXT2.10@116.84,30.558
  B.Cu w0.254: v1(103.251,55.577) 104.14,54.688 R35.2@104.267,54.688
  B.Cu w1.016: EXT2.10@116.84,29.766 EXT2.10@116.84,30.558
GPIO14\HS2_CLK: EXT2.9 R40.1 U9.13 UEXT1.9 | length 66.3
  F.Cu w0.152: 96.647,63.959 96.774,63.959 98.933,66.118 101.117,66.118 101.805,65.431 104.496,65.431 105.043,65.978 110.401,65.978 v1(110.719,66.296) ; 109.22,50.624 109.22,51.005 110.416,52.201 110.416,56.011 111.379,56.974 114.173,56.974 v1(114.3,56.847)
  F.Cu w0.508: U9.13@95.54,63.881 95.618,63.959 96.647,63.959 ; UEXT1.9@109.22,48.388 109.22,50.624
  B.Cu w0.152: 112.014,65.991 112.649,65.356 112.649,62.435 113.779,61.305 113.779,58.384 113.919,58.244 113.919,57.228 v1(114.3,56.847) 114.478,56.669 114.478,49.988 114.783,49.683 114.783,39.346 115.316,38.813 115.316,34.749 116.84,33.225
  B.Cu w0.406: v1(110.719,66.296) 110.769,66.245 R40.1@111.76,66.245 112.014,65.991
  B.Cu w1.016: EXT2.9@116.84,32.306 116.84,33.225
GPIO15\HS2_CMD: EXT2.8 MICRO_SD1.3 R39.2 U9.23 UEXT1.7 | length 63.6
  F.Cu w0.152: v1(105.41,59.641) 107.823,59.641 108.585,60.403 ; 107.315,50.243 107.95,50.243 110.109,52.402 110.109,56.212 111.506,57.609 114.427,57.609 v1(114.554,57.736) ; 108.585,62.562 109.093,63.07 110.323,63.07 110.744,62.649 110.744,62.214 111.331,61.628 113.964,61.628 114.427,61.165 ; v1@114.46,59.854 114.46,59.921 v1(114.462,59.923)
  F.Cu w0.254: 114.427,61.165 R39.2@114.427,60.657 114.427,59.958 v1(114.462,59.923)
  F.Cu w0.508: 108.585,60.403 108.585,61.496 U9.23@108.6,61.511 108.585,61.526 108.585,62.562
  F.Cu w0.762: UEXT1.7@106.68,48.388 106.68,49.608 107.315,50.243
  B.Cu w0.152: v1(105.41,59.641) 105.918,60.149 105.918,64.01 106.426,64.518 106.426,65.864 105.791,66.499 ; v1(114.462,59.923) 114.084,59.545 114.084,58.714 114.554,58.244 v1(114.554,57.736) 114.935,57.355 114.935,56.593 114.783,56.441 114.783,50.268 115.087,49.964 115.087,39.55 115.697,38.94 115.697,36.908 116.84,35.765
  B.Cu w0.406: MICRO_SD1.3@105.79,67.259 MICRO_SD1.3@105.79,67.259 105.791,66.499
  B.Cu w1.016: EXT2.8@116.84,34.846 116.84,35.765
GPIO16\I2C-SCL: EXT2.7 R31.2 U9.27 UEXT1.5 | length 51.5
  F.Cu w0.152: 104.7,50.449 105.918,51.666 105.918,57.101 106.045,57.228 109.093,57.228 110.49,58.625 112.776,58.625 113.157,59.006 v1(114.681,59.006)
  F.Cu w0.508: U9.27@112.74,65.151 114.124,65.151 v1(114.173,65.102) 114.681,64.594 R31.2@115.697,64.594
  F.Cu w0.762: UEXT1.5@104.14,48.388 104.14,49.888 104.7,50.449
  B.Cu w0.152: v1(114.173,65.102) 114.3,64.975 114.3,61.038 115.062,60.276 115.062,59.387 v1(114.681,59.006) 114.681,58.752 115.316,58.117 115.316,56.466 115.087,56.237 115.087,50.472 115.392,50.167 115.392,39.753 116.84,38.305
  B.Cu w1.016: EXT2.7@116.84,37.386 116.84,38.305
GPIO17\EMAC_CLK_OUT_180: U4.5 U9.28 | length 63.2
  F.Cu w0.152: v1(95.732,61.572) 96.546,61.572 96.774,61.8 96.774,63.197 99.39,65.813 100.991,65.813 101.679,65.126 104.622,65.126 105.169,65.673 111.061,65.673 111.76,66.372
  F.Cu w0.508: U9.28@112.691,66.372 U9.28@112.74,66.421
  F.Cu w0.61: 111.76,66.372 U9.28@112.691,66.372
  B.Cu w0.152: v1(95.732,61.572) 95.758,61.546 95.758,59.768 96.85,58.676 96.85,56.888 97.765,55.973 97.765,55.432 99.525,53.672 100.813,53.672 102.225,52.26 102.225,51.93 107.37,46.784 107.37,37.488 107.95,36.908 107.95,31.828 107.315,31.193 106.68,31.193 106.324,30.837 106.324,28.501 106.553,28.272 106.87,28.272 107.891,27.252 U4.5@108.294,27.252 ; 107.823,27.32 107.836,27.307 U4.5@108.204,27.307
GPIO18\MDIO(RMII): RM2.4.2 U4.16 U9.30 | length 65.6
  F.Cu w0.152: v1(97.313,67.015) 97.74,66.588 109.576,66.588 111.379,68.391 111.379,68.575 111.713,68.908
  F.Cu w0.508: 111.713,68.908 112.687,68.908 U9.30@112.74,68.961
  B.Cu w0.152: 96.963,65.675 97.252,65.386 ; v1(97.313,67.015) 97.252,66.954 97.252,65.386 ; 112.494,30.022 112.799,30.327 112.799,32.491 111.125,34.165 111.125,35.541 108.589,38.077 108.589,47.297 103.444,52.443 103.444,52.768 101.321,54.891 100.035,54.891 98.984,55.943 98.984,56.478 98.069,57.393 98.069,59.206 97.252,60.024 97.252,65.386 ; 97.252,65.386 96.774,65.864 96.901,65.864 97.252,65.513 97.252,65.386
  B.Cu w0.254: RM2.4.2@96.52,66.051 RM2.4.2@96.628,65.943 ; U4.16@112.494,29.452 112.494,30.022
  B.Cu w0.406: 97.008,66.71 97.008,65.948 97.125,65.831
  B.Cu w0.508: RM2.4.2@96.52,66.245 96.543,66.245 97.008,66.71 v1(97.313,67.015)
GPIO19\EMAC_TXD0(RMII): U4.22 U9.31 | length 73.8
  F.Cu w0.152: v1(99.125,73.141) 99.123,73.142 99.123,73.611 100.393,74.881 107.061,74.881 111.76,70.182
  F.Cu w0.61: 111.76,70.182 112.691,70.182 U9.31@112.74,70.231
  B.Cu w0.152: v1(99.125,73.141) 99.125,73.038 99.479,72.684 99.479,66.554 99.828,66.205 99.828,64.792 100.838,63.782 100.838,61.088 99.047,59.297 99.047,57.708 99.898,56.857 99.898,56.331 100.424,55.806 101.702,55.806 104.358,53.149 104.358,52.824 109.504,47.678 109.504,38.478 112.268,35.714 112.268,34.317 113.734,32.852 113.734,30.235 114.224,29.745 114.224,28.856 115.138,27.942 115.138,27.078 114.312,26.252 113.653,26.252
  B.Cu w0.254: U4.22@113.194,26.252 113.653,26.252
GPIO21\EMAC_TX_EN(RMII): U4.21 U9.33 | length 72.8
  F.Cu w0.152: v1(98.416,73.614) 98.695,73.614 100.267,75.186 107.264,75.186 109.728,72.722 111.76,72.722
  F.Cu w0.61: 111.76,72.722 112.691,72.722 U9.33@112.74,72.771
  B.Cu w0.152: v1(98.416,73.614) 98.416,72.985 99.162,72.239 99.162,70.066 98.196,69.101 98.196,66.601 97.861,66.266 97.861,60.276 98.679,59.458 98.679,57.645 99.593,56.731 99.593,56.199 100.292,55.501 101.575,55.501 104.054,53.022 104.054,52.697 109.199,47.551 109.199,38.341 111.887,35.653 111.887,34.266 113.421,32.732 113.421,30.04 113.919,29.542 113.919,28.653 114.783,27.789 114.783,27.231 114.304,26.752 113.661,26.752
  B.Cu w0.254: U4.21@113.194,26.752 113.661,26.752
GPIO22\EMAC_TXD1(RMII): U4.23 U9.36 | length 76.8
  F.Cu w0.152: v1(98.399,76.749) 98.749,77.099 98.969,77.319 110.134,77.319 110.795,76.659 111.506,76.659
  F.Cu w0.508: 111.506,76.659 112.662,76.659 U9.36@112.74,76.581
  B.Cu w0.152: v1(98.399,76.749) 98.425,76.723 98.425,74.691 99.784,73.332 99.784,66.68 100.132,66.332 100.132,64.919 101.143,63.908 101.143,60.962 99.352,59.171 99.352,57.834 100.203,56.983 100.203,56.466 100.559,56.11 101.829,56.11 104.663,53.276 104.663,52.951 109.809,47.805 109.809,38.615 112.649,35.775 112.649,34.368 114.046,32.971 114.046,30.431 114.529,29.948 114.529,29.059 115.494,28.094 115.494,26.926 114.32,25.752 113.645,25.752
  B.Cu w0.254: U4.23@113.194,25.752 113.645,25.752